# EAGLE board GabozePocaio-Extension-Aux (EAGLE 9.0.0)
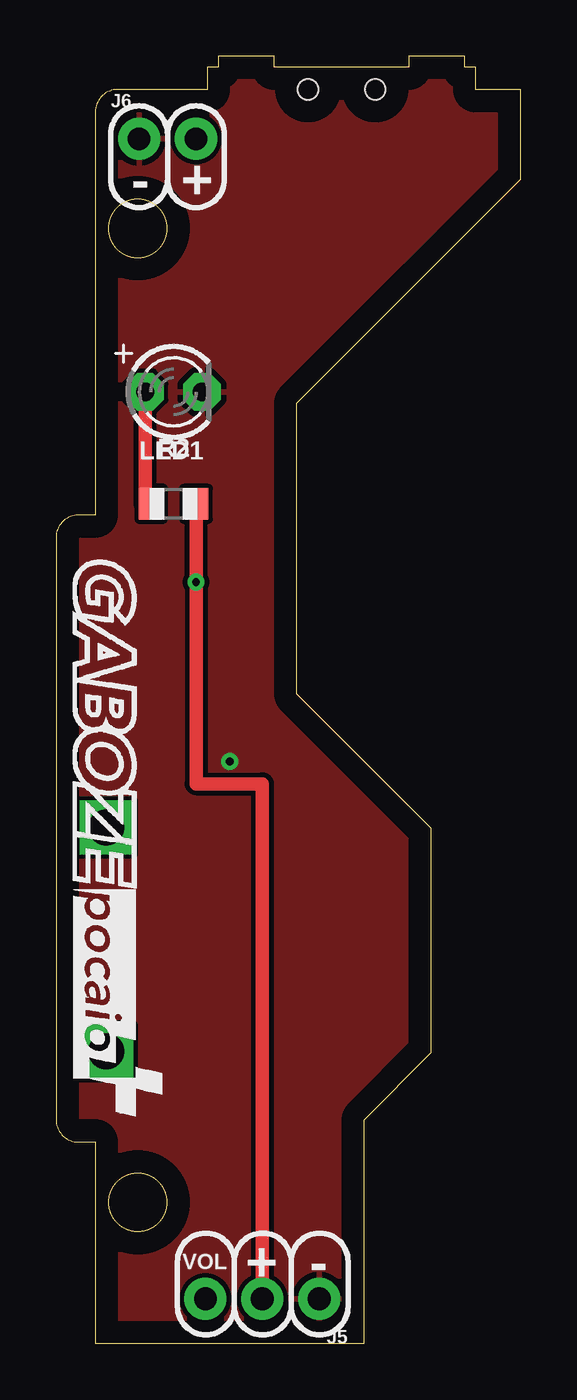
[diagram p0: board, top side]
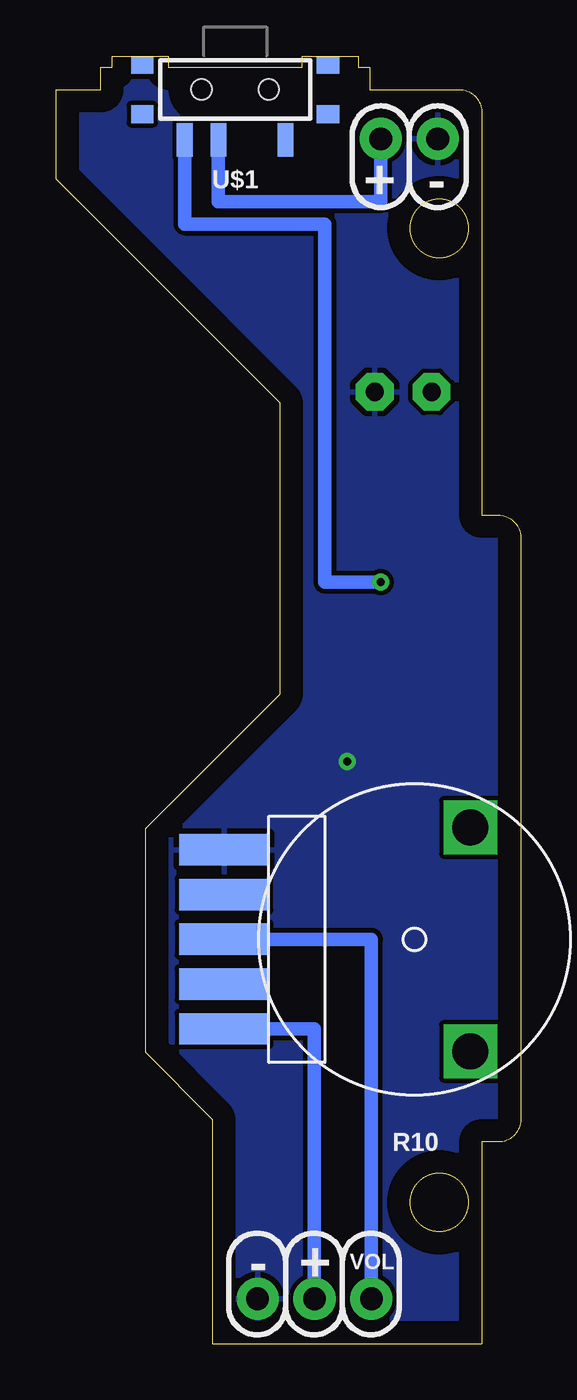
[diagram p1: board, bottom side, seen from below]

Size 20.75 x 57.5 mm. Coordinates in mm from the lower left corner, seen from the top.
Outline: 20.75,56 18.75,56 18.75,57 18.25,57 18.25,57.5 15.75,57.5 15.75,57 9.75,57 9.75,57.5 7.25,57.5 7.25,57 6.75,57 6.75,56 2.75,56 arc90 1.75,55 1.75,37 1,37 arc90 0,36 0,10 arc90 1,9 1.75,9 1.75,0 13.75,0 13.75,10 16.75,13 16.75,23 10.75,29 10.75,42 20.75,52 20.75,56
Outline: circle at 3.65,49.8 radius 1.3
Outline: circle at 3.65,6.3 radius 1.3
Copper layers (1*16): Top 0.035mm / dielectric 1.5mm / Bottom 0.035mm
Design rules "default *": minimum track width 10mil, minimum drill 24mil, track to track 8mil, track to pad 8mil, pad to pad 8mil, via to via 8mil, smd to smd 8mil, copper to edge 40mil, drill to drill 8mil, minimum pad ring 10mil, minimum via ring 8mil, stop-mask expansion 5mil, vias tented up to drill 10mil, thermal gap 10mil

## Footprints (pad centres in the part's own frame; a part is rotated, then mirrored left to right if it is on the bottom)
1X03_NO_SILK = drill 1.016 pad 1.88: 1 0,0; 2 2.54,0; 3 5.08,0
1X02_NO_SILK = drill 1.016 pad 1.88: 1 0,0; 2 2.54,0
LED3MM = drill 0.813 pad 1.676 octagon: A -1.27,0; K 1.27,0
R0805 = smd 1.1 x 1.4: 1 -1,0; 2 1,0
VOLUME = smd 1.4 x 4: 1 -4,-2; 2 -2,-2; 3 0,-2; 4 2,-2; 5 4,-2 | drill 1.6 square: P$6 -5,9; P$7 5,9
KPS-1290 = smd 0.7 x 1.5: O -2.25,2.25; P 0.75,2.25; S 2.25,2.25 | smd 1 x 0.8: P$1 -4.15,1.1; P$2 -4.15,-1.1; P$3 4.15,-1.1; P$4 4.15,1.1 | hole 0.9: -1.5,0; 1.5,0

## Placement (x,y rotation side)
J5  [1X03_NO_SILK]  11.75,2 180 top
J6  [1X02_NO_SILK]  3.71,53.8 0 top
LED1  Red  [LED3MM]  5.25,42.5 0 top
R2  1.5K Ohms  [R0805]  5.25,37.5 0 top
R10  27k  [VOLUME]  11.25,18.05 270 bottom
U$1  SWITCH_SPDT  [KPS-1290]  12.75,56 180 bottom

## Library data of the parts
J5 J6 = SparkFun-Connectors
LED1 R2 = adafruit
R10 = GBA
U$1 = SparkFun-Retired; PROD_ID: SWCH-10651

## Nets
5V0-IN: J6.2 U$1.P
5V0-OUT: J5.2 R2.2 R10.5 U$1.S
DC_VOL: J5.3 R10.3
GND: J5.1 J6.1 LED1.K R10.1
LED: LED1.A R2.1

## Tracks (layer width: path | path; a pad name or v marks a point on that pad's centre or on a via)
5V0-IN
  Bottom 0.61: U$1.P 13.5,51 6.25,51 J6.2
5V0-OUT  (via drill 0.35)
  Top 0.61: R2.2 v6.25,34 6.25,25 9.21,25 J5.2
  Bottom 0.61: R10.5 9.21,14.05 J5.2 | U$1.S 15,50 8.75,50 8.75,34 v6.25,34
DC_VOL
  Bottom 0.61: J5.3 6.67,18.05 R10.3
GND  (via drill 0.35)
  other vias: 7.75,26
  pour Top: 13.75,0 1.75,0 1.75,9 0,9 0,37 1.75,37 1.75,56 6.75,56 6.75,57 7.25,57 7.25,57.5 9.75,57.5 9.75,57 15.75,57 15.75,57.5 18.25,57.5 18.25,57 18.75,57 18.75,56 20.75,56 20.75,52 10.75,42 10.75,29 16.75,23 16.75,13 13.75,10
  pour Bottom: 13.75,0 1.75,0 1.75,9 0,9 0,37 1.75,37 1.75,56 6.75,56 6.75,57 7.25,57 7.25,57.5 9.75,57.5 9.75,57 15.75,57 15.75,57.5 18.25,57.5 18.25,57 18.75,57 18.75,56 20.75,56 20.75,52 10.75,42 10.75,29 16.75,23 16.75,13 13.75,10
LED
  Top 0.61: R2.1 3.98,37.5 LED1.A

## Text on the board
tPlace: - | + | VOL | + | -
bPlace: - | + | VOL | + | -